# Altium PCB rpi_adapter.PcbDoc (part 1 of 3)
Units mil, origin at the board's own origin, x right, y up, seen from the top; angles counter-clockwise.
Board outline 1339.12 x 1250 mil, 4 copper layers (Top Layer, L02_GND, L03_GND, Bottom Layer), stack 36.268 mil thick; 18 components, 28 nets, 121 pads, 201 vias.
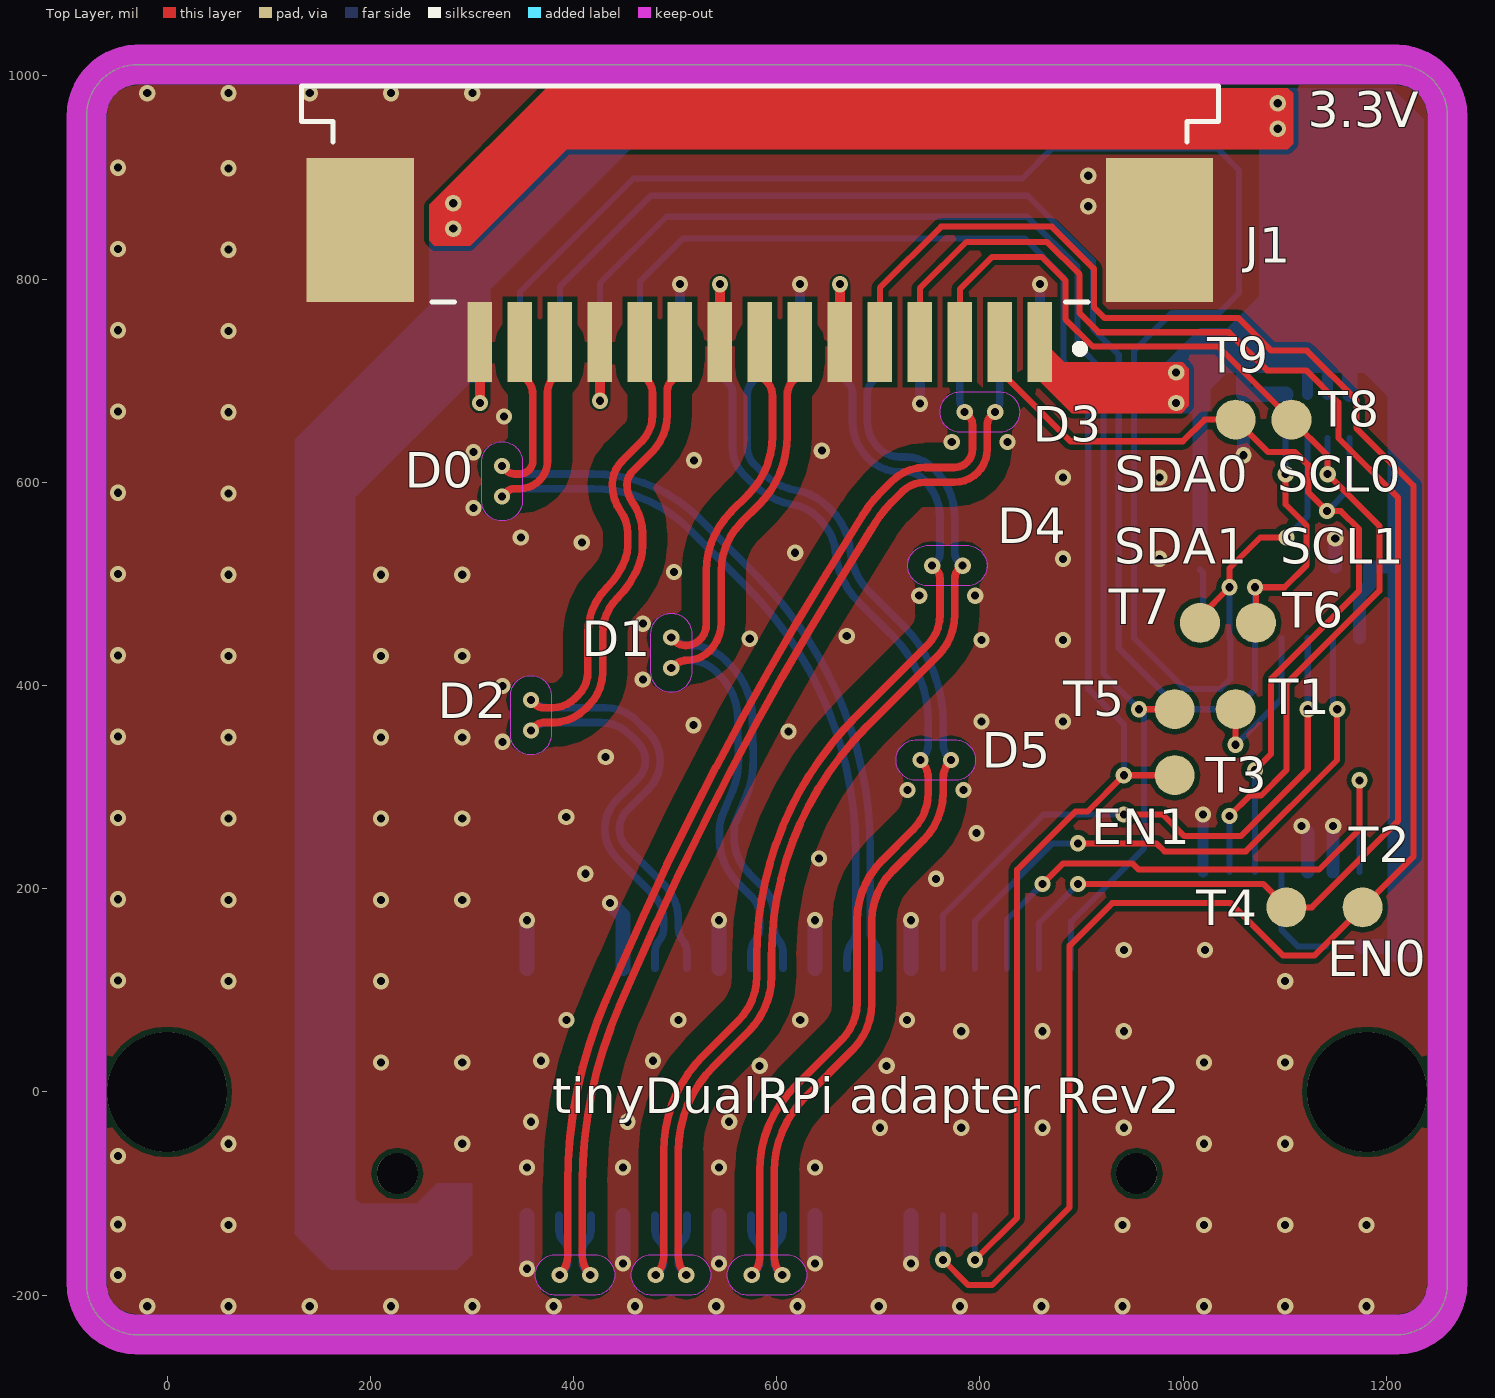
[diagram p0: Top Layer view]
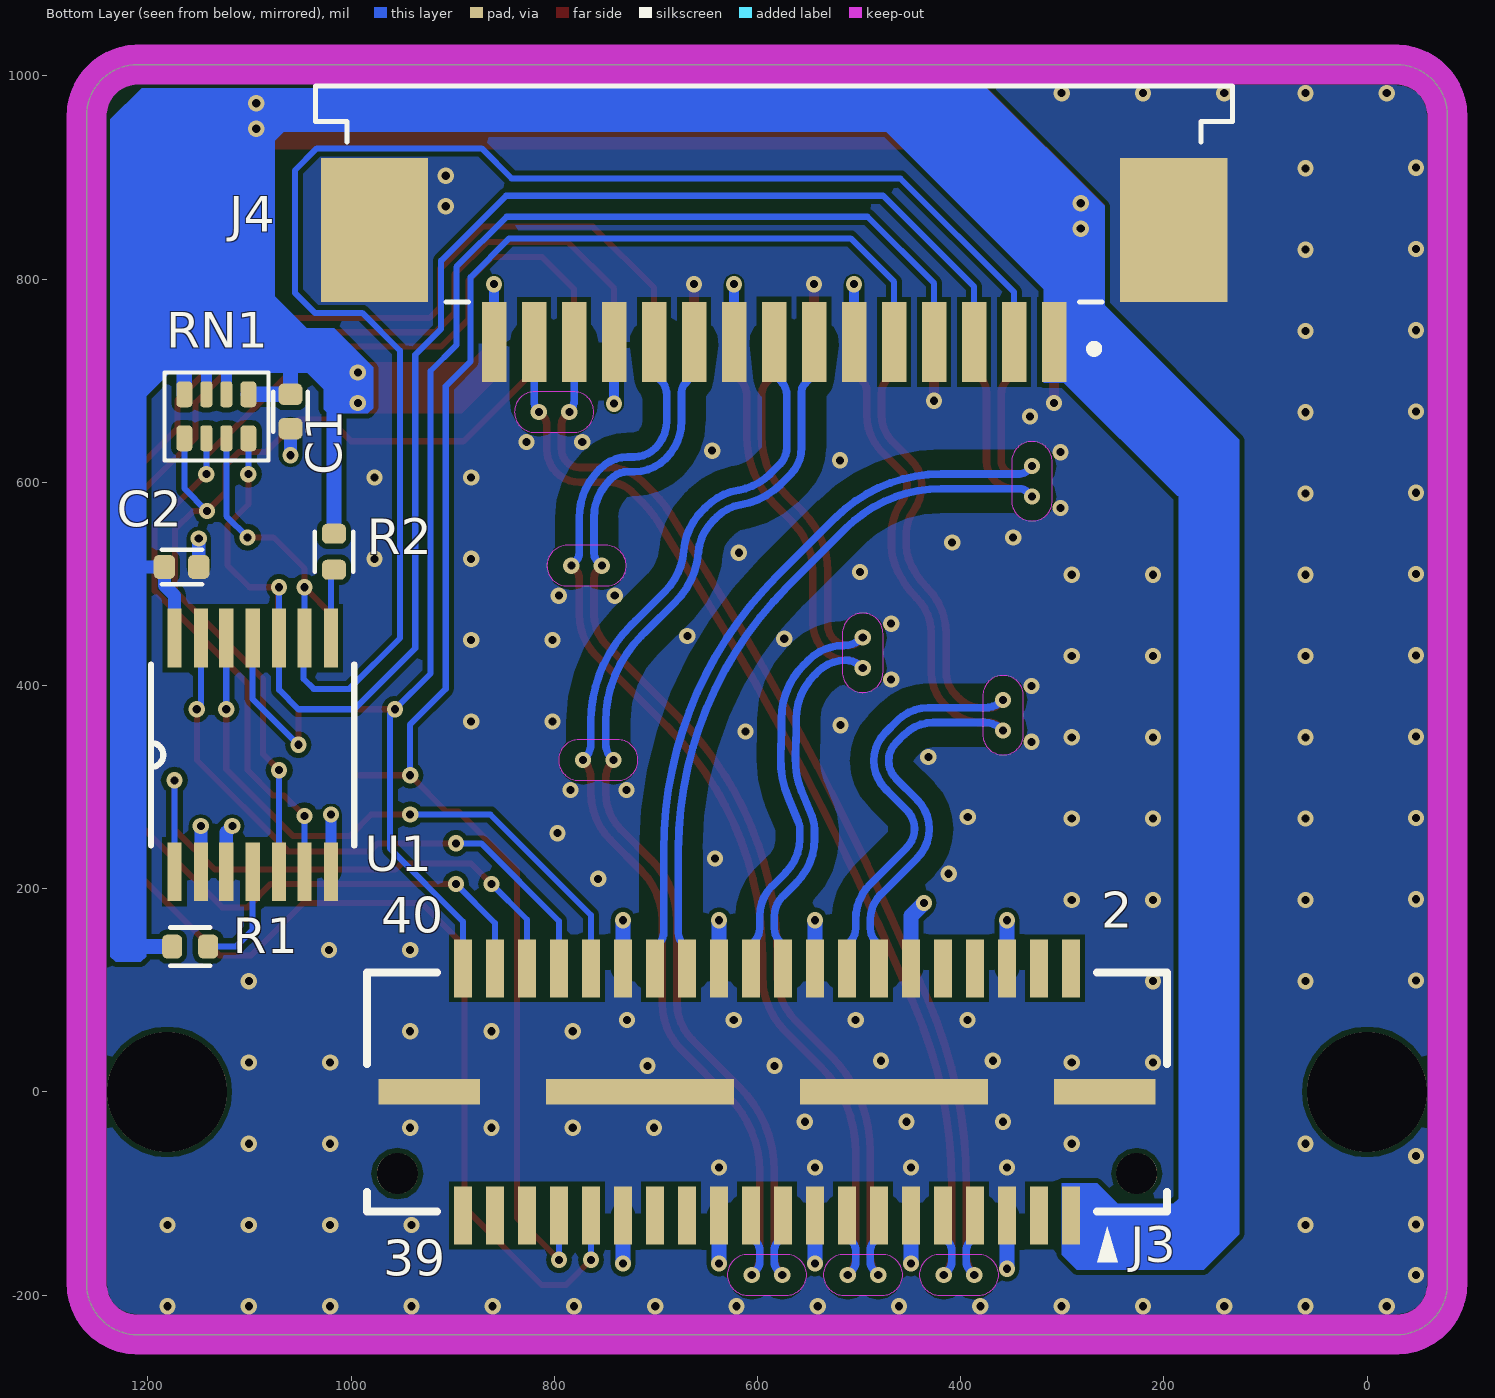
[diagram p1: Bottom Layer view, seen from below]
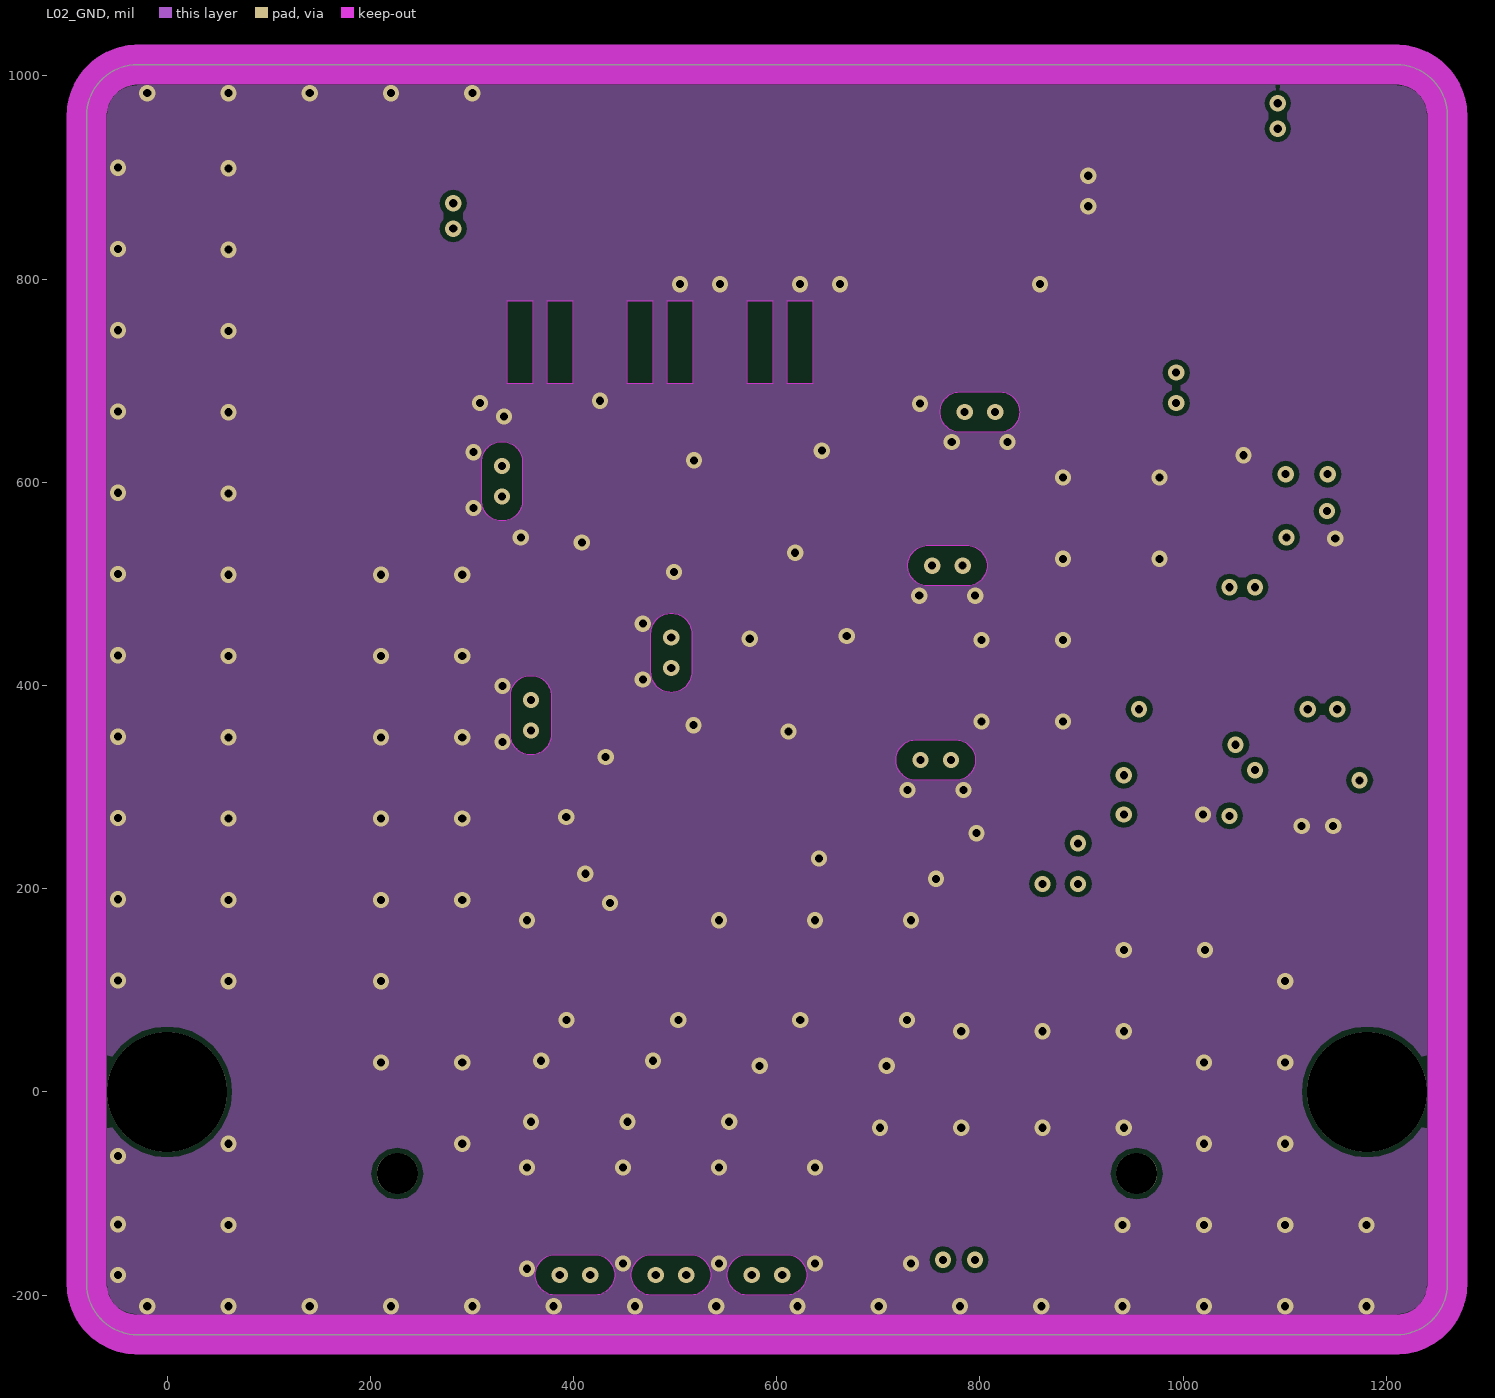
[diagram p2: L02_GND]
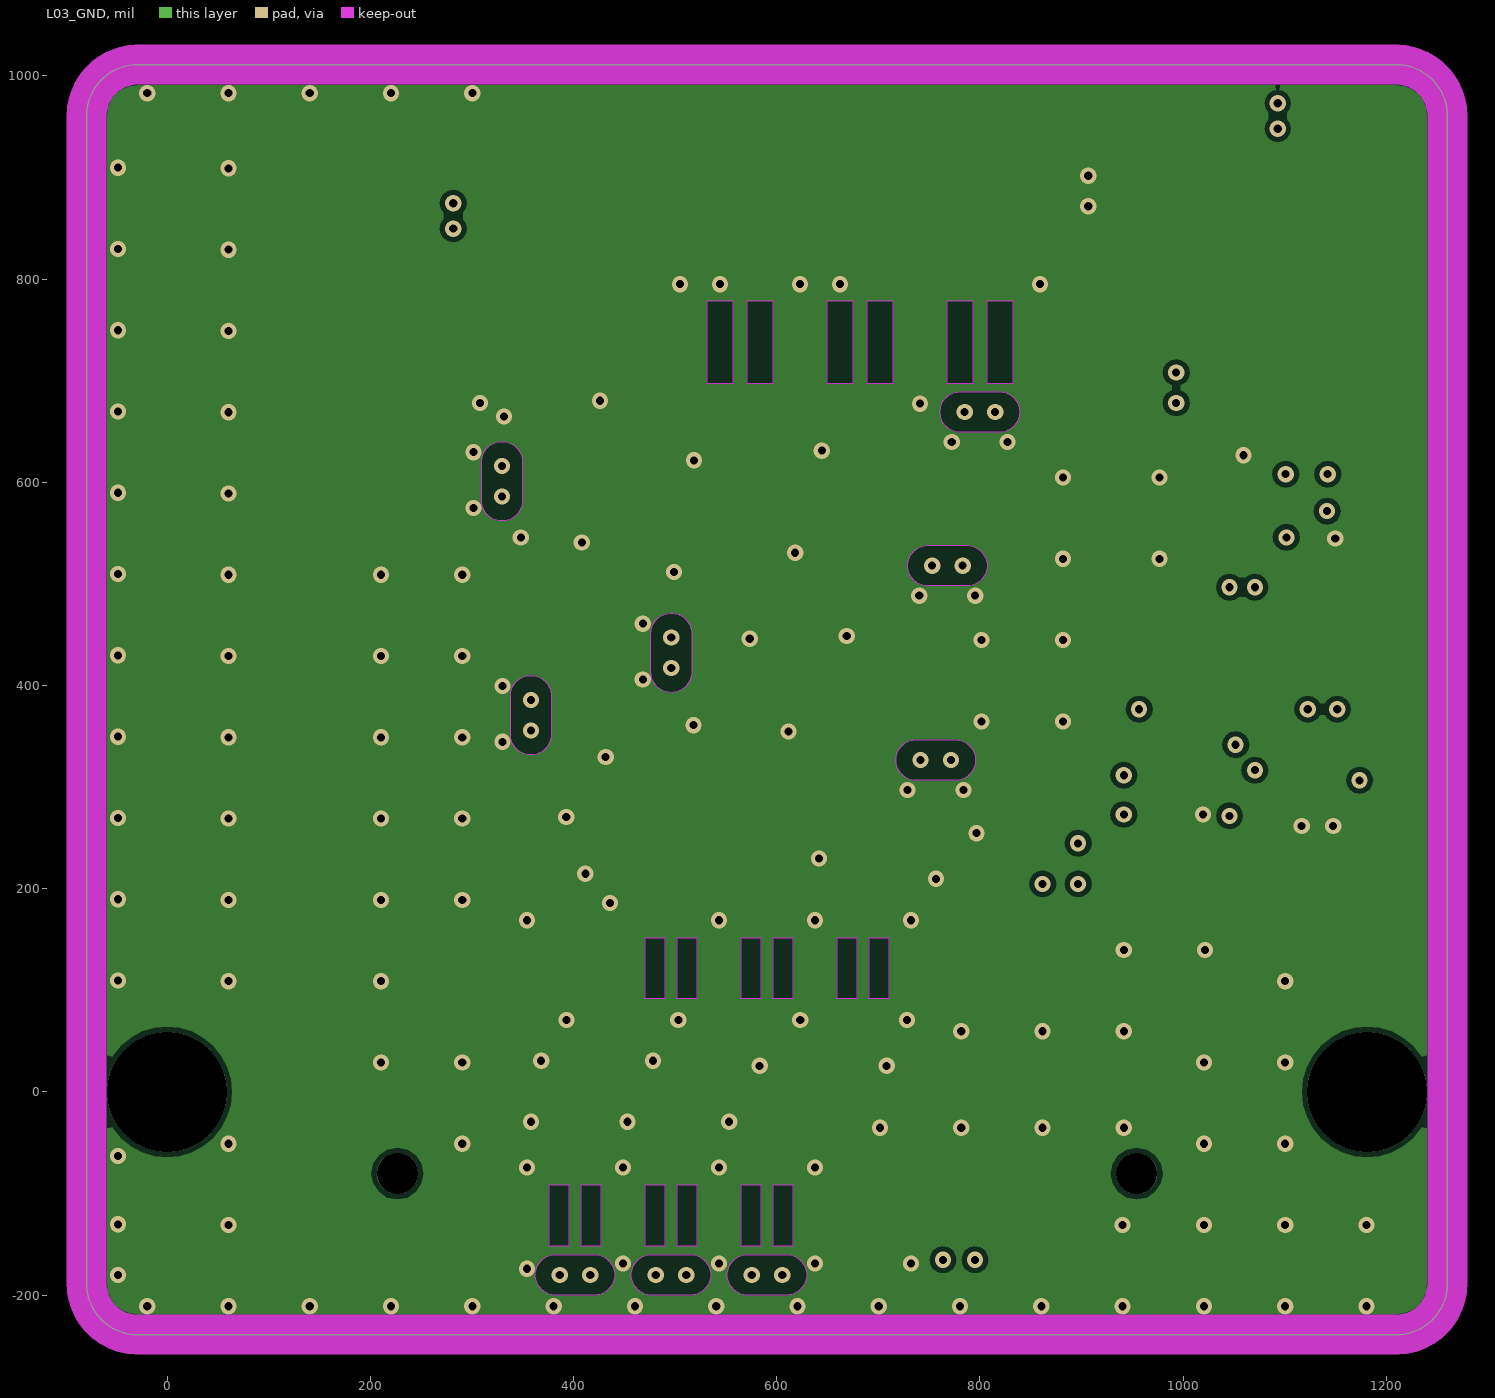
[diagram p3: L03_GND]
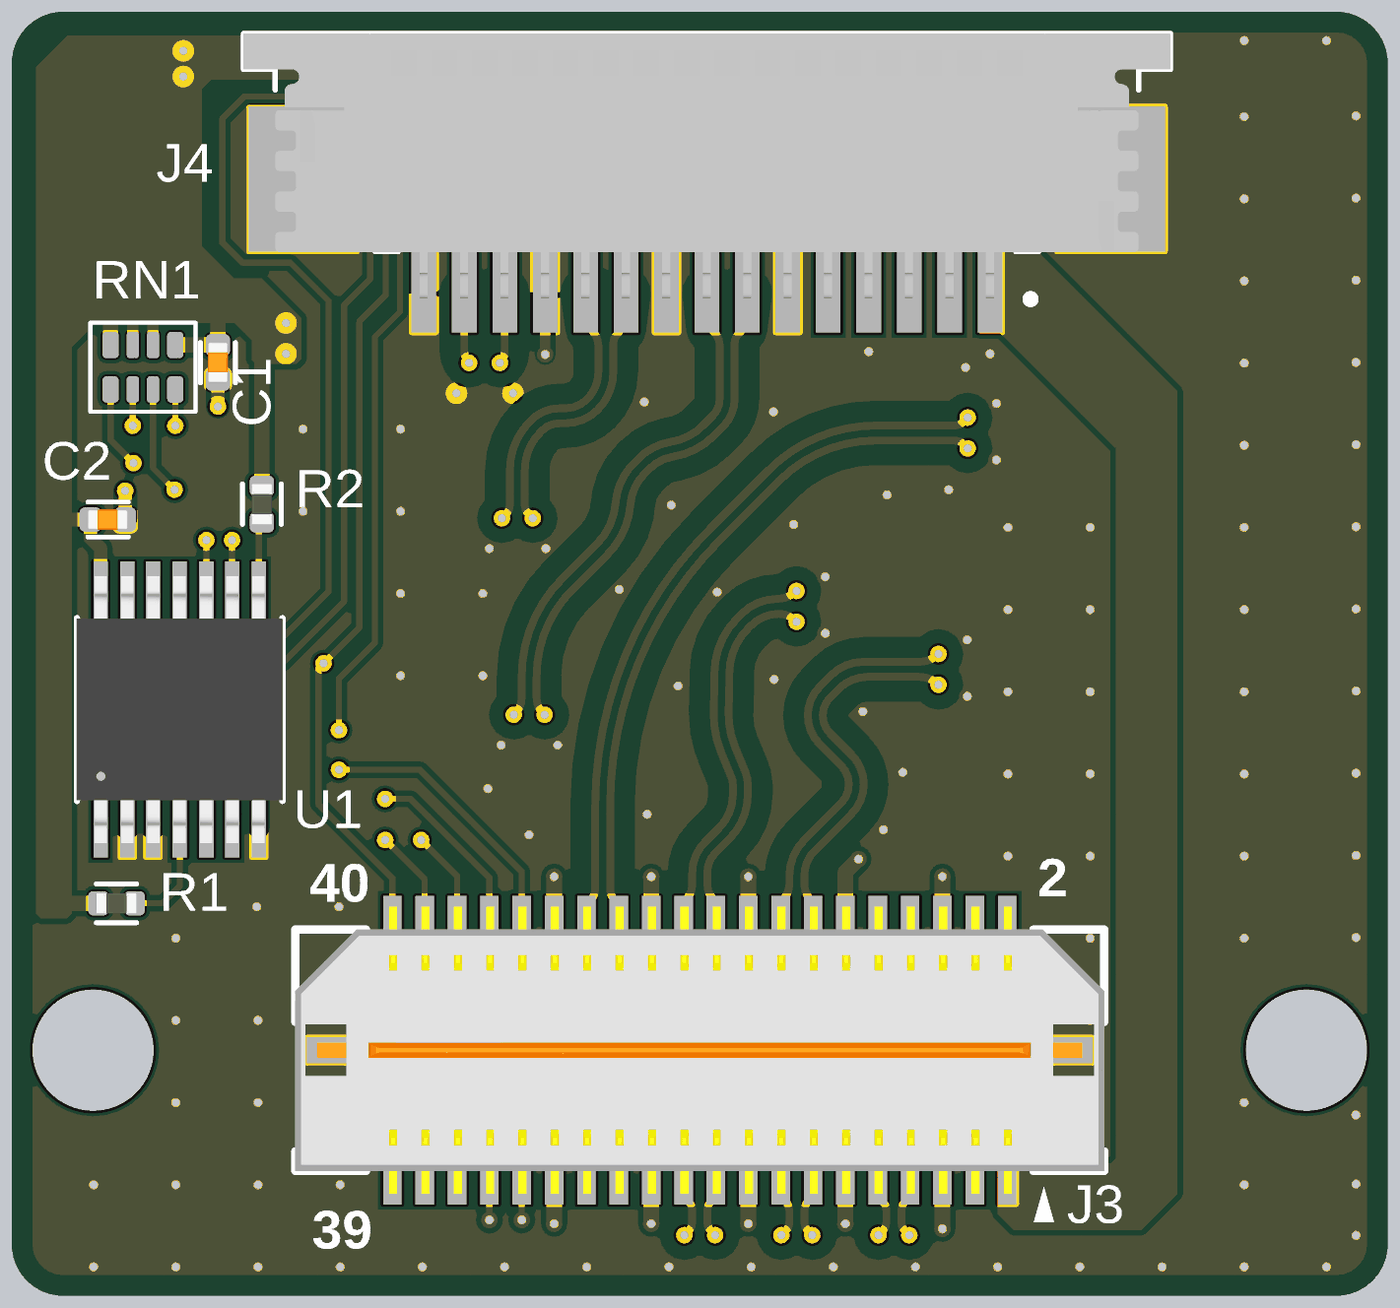
[diagram p5: 3D render of the assembled board from below, using the file's embedded part models]

## Layer stack, top to bottom
Top Solder: solder mask 1, SM-001, Dk 4
Top Layer: signal copper 1.378
Dielectric 1: prepreg 8.2835, 7628*1, Dk 4.05
L02_GND: signal copper 0.5984
Dielectric 2: core 15.748, Core, Dk 4.05
L03_GND: signal copper 0.5984
Dielectric 3: prepreg 8.2835, 7628*1, Dk 4.05
Bottom Layer: signal copper 1.378
Bottom Solder: solder mask 1, SM-001, Dk 4

## Board outline
-79.01,-188.99 ccw(c-29.01,-188.99) -29.01,-238.99 1210.11,-238.99 ccw(c1210.11,-188.99) 1260.11,-188.99 1260.11,961.01 ccw(c1210.11,961.01) 1210.11,1011.01 -29.01,1011.01 ccw(c-29.01,961.01) -79.01,961.01

## Design rules (kind name [scope] priority, off if disabled: settings)
BoardOutlineClearance [(IsPolygon OR IsTrack) AND IsNet] p1: gap=20 ignorepadtopadclearanceinfootprint=FALSE
Clearance Clearance_MIPI [InNetClass('MIPI')] p1: gap=5 ignorepadtopadclearanceinfootprint=TRUE except(20: Arc-Poly Track-Poly)
Clearance Clearance_Keepout [IsKeepOut] p2: gap=0.01 ignorepadtopadclearanceinfootprint=TRUE
Clearance Clearance_Poly [(IsTrack or IsArc) and InAnyDifferentialPair vs InNet('GND')    and InPoly] p3: gap=25 ignorepadtopadclearanceinfootprint=TRUE
Clearance Clearance_FID [InComponent('Designator1') OR InComponent('Designator2') OR InComponent('Designator3') OR InComponent('Designator4') OR InComponent('Designator5') OR InComponent('Designator6')] p4: gap=6 ignorepadtopadclearanceinfootprint=TRUE except(0: Arc-Arc; 5: Arc-Fill Arc-Poly Arc-Region Track-Fill Track-Poly Track-Region SMDPad-Fill SMDPad-Poly SMDPad-Region Via-Fill Via-Poly Via-Region; 5.98: Arc-Track)
Clearance [All] p5: gap=5 ignorepadtopadclearanceinfootprint=TRUE
ComponentClearance [All] p1 off: gap=5 collisioncheckmode=3 verticalgap=10 showdistances=FALSE
DiffPairsRouting [All] p1: maxlimit=7 minlimit=7 mostfreqgap=7 toplayer_minwidth=7.55 toplayer_maxwidth=7.55 toplayer_prefwidth=7.55 midlayer1_minwidth=7.55 midlayer1_maxwidth=7.55 midlayer1_prefwidth=7.55 midlayer2_minwidth=7.55 midlayer2_maxwidth=7.55 midlayer2_prefwidth=7.55 bottomlayer_minwidth=7.55 bottomlayer_maxwidth=7.55 bottomlayer_prefwidth=7.55 maxuncoupledlength=500
Height [All] p1 off: minheight=0 maxheight=1000 prefheight=500
HoleSize [All] p1: absolutevalues=TRUE maxlimit=120 minlimit=1 maxpercent=80.000 minpercent=20.000
MatchedLengths MatchedLengths_CAM [InDifferentialPairClass('CAM0') or InDifferentialPairClass('CAM1')] p1: tolerance=5 checknetsindiffpair=TRUE checkdiffpairvsdiffpair=FALSE checkxsignals=FALSE checkothers=FALSE
MinimumSolderMaskSliver [All] p1: minsoldermaskwidth=1.5
PlaneClearance [All] p1: clearance=10
PolygonConnect PolygonConnect_1 [InNet('VDD_IR')] p1: connectstyle=Direct reliefconductorwidth=10 reliefentries=4 polygonreliefangle="90 Angle" airgapwidth=10
PolygonConnect [All] p2: thpad.connectstyle=Relief thpad.reliefconductorwidth=10 thpad.reliefentries=4 thpad.polygonreliefangle="90 Angle" thpad.airgapwidth=10 smdpad.connectstyle=Direct smdpad.reliefconductorwidth=10 smdpad.reliefentries=4 smdpad.polygonreliefangle="90 Angle" smdpad.airgapwidth=10 via.connectstyle=Direct via.reliefconductorwidth=10 via.reliefentries=4 via.polygonreliefangle="90 Angle" via.airgapwidth=10
RoomDefinition "AiC camera adapter" [InComponentClass('AiC camera adapter')] p1 off: confinementstyle=ConfineIn formatcopy=TRUE lockcomponents=FALSE outline 423.28,-538.96 3809.28,-538.96 3809.28,1510.04 423.28,1510.04
RoutingVias [All] p1: holewidth=8 width=16 viastyle="Through Hole" minholewidth=8 minwidth=16 maxholewidth=8 maxwidth=16
ShortCircuit [IsNet] p1: allowed=FALSE
SilkToSilkClearance [All] p1: silktosilkclearance=1
SilkToSolderMaskClearance [IsPad] p1: minsilkscreentomaskgap=1 clearancetoexposedcopper=TRUE
SolderMaskExpansion SolderMaskExpansion_via [IsVia] p1: expansion=3 istentingtop=FALSE
SolderMaskExpansion [All] p2: expansion=2.5 istentingtop=FALSE
Width [All] p1: maxlimit=50 minlimit=6 preferedwidth=6
21 further rules are at their usual default settings.

## Classes and differential pairs
differential pair class MIPI: MIPI_CLK MIPI_D0 MIPI_D1
net class MIPI: DIFF0_N DIFF0_P DIFF1_N DIFF1_P DIFF2_N DIFF2_P DIFF3_N DIFF3_P DIFF4_N DIFF4_P DIFF5_N DIFF5_P
differential pair DIFF5: +DIFF5_P -DIFF5_N
differential pair DIFF4: +DIFF4_P -DIFF4_N
differential pair DIFF3: +DIFF3_P -DIFF3_N
differential pair DIFF2: +DIFF2_P -DIFF2_N
differential pair DIFF1: +DIFF1_P -DIFF1_N
differential pair DIFF0: +DIFF0_P -DIFF0_N
differential pair MIPI_D1: +"" -""
differential pair MIPI_D0: +"" -""
differential pair MIPI_CLK: +"" -""

## Components (designator, comment, footprint, x,y, rotation, side; value= is the part's Value field where it differs from the comment)
C1 "0.1uF" CAPC1005X55USR 1059.6,669.72 r90 bottom
C2 "0.1uF" CAPC1005X55USR 1166.76,516.68 r0 bottom
J1 "1-84953-5" TE_1-84953-5 583.56,738.02 r180 top
J3 "QTE-020-01-F-D-A-K" SAMTEC_QTE-020-01-X-D-A 590.55,0 r0 bottom locked
J4 "1-84953-5" TE_1-84953-5 583.56,738.02 r0 bottom
R1 "1K" RESC1005X40USR 1158.28,143.04 r0 bottom
R2 "1K" RESC1005X40USR 1016.77,531.68 r90 bottom
RN1 "10K" RESCAXS50P100X200X45-8NA 1132.55,665 r90 bottom
T1 "TP_S" "TP 1mm" 1051.77,376.68 r0 top
T2 "TP_S" "TP 1mm" 1176.77,181.68 r0 top
T3 "TP_S" "TP 1mm" 991.77,311.68 r0 top
T4 "TP_S" "TP 1mm" 1101.77,181.68 r0 top
T5 "TP_S" "TP 1mm" 991.77,376.68 r0 top
T6 "TP_S" "TP 1mm" 1071.77,461.68 r0 top
T7 "TP_S" "TP 1mm" 1016.77,461.68 r0 top
T8 "TP_S" "TP 1mm" 1106.77,661.68 r0 top
T9 "TP_S" "TP 1mm" 1051.77,661.68 r0 top
U1 "PCA9542APW,118" SOP65P640X110-14N 1096.77,331.68 r90 bottom

## Footprints (in the part's own frame and the unit in brackets; to place one, negate y for a bottom-side part, rotate by r counter-clockwise, add the part's x,y. Pads: shape width x height; smd on the part's side, far side on the other; paste and mask are expansions set on the pad)
CAPC1005X55USR [mm] "Capacitor, Chip; 1.00 mm L X 0.50 mm W X 0.55 mm H body"
  rrect52% 0.54x0.6 smd mask+0.051: 1(-0.43,0) 2(0.43,0)
  silkscreen extent -0.51,-0.43 0.49,0.43, body extent -0.5,-0.25 0.5,0.25, height 0.55
RESC1005X40USR [mm] "Resistor, Chip; 1.00 mm L X 0.50 mm W X 0.40 mm H body"
  rrect52% 0.5x0.6 smd mask+0.051: 1(-0.45,0) 2(0.45,0)
  silkscreen extent -0.5,-0.48 0.5,0.48, body extent -0.5,-0.25 0.5,0.25, height 0.4
RESCAXS50P100X200X45-8NA [mm] "2 Side, Convex"
  rrect50% 0.65x0.4 smd mask+0.051: 1(-0.55,0.8) 4(-0.55,-0.8) 5(0.55,-0.8) 8(0.55,0.8)
  rrect50% 0.65x0.3 smd mask+0.051: 2(-0.55,0.25) 3(-0.55,-0.25) 6(0.55,-0.25) 7(0.55,0.25)
  silkscreen extent -1.1,-1.3 1.1,1.3, body extent -0.65,-1.15 0.65,1.15, height 0.45
SAMTEC_QTE-020-01-X-D-A [mm]
  rect 0.46x1.45 smd: 01(-7.6,3.09) 02(-7.6,-3.09) 03(-6.8,3.09) 04(-6.8,-3.09) 05(-6,3.09) 06(-6,-3.09) 07(-5.2,3.09) 08(-5.2,-3.09) 09(-4.4,3.09) 10(-4.4,-3.09) 11(-3.6,3.09) 12(-3.6,-3.09) 13(-2.8,3.09) 14(-2.8,-3.09) 15(-2,3.09) 16(-2,-3.09) 17(-1.2,3.09) 18(-1.2,-3.09) 19(-0.4,3.09) 20(-0.4,-3.09) 21(0.4,3.09) 22(0.4,-3.09) 23(1.2,3.09) 24(1.2,-3.09) 25(2,3.09) 26(2,-3.09) 27(2.8,3.09) 28(2.8,-3.09) 29(3.6,3.09) 30(3.6,-3.09) 31(4.4,3.09) 32(4.4,-3.09) 33(5.2,3.09) 34(5.2,-3.09) 35(6,3.09) 36(6,-3.09) 37(6.8,3.09) 38(6.8,-3.09) 39(7.6,3.09) 40(7.6,-3.09)
  rect 2.54x0.64 smd: G1(-8.445,0) G4(8.445,0)
  rect 4.7x0.64 smd: G2(-3.175,0) G3(3.175,0)
  round 1.02 hole 1.02 unplated: ""(-9.24,2.04) ""(9.24,2.04)
  silkscreen extent -10,-2.98 10,4.25, body extent -10.01,-3.56 10.01,3.56, height 4.26
SOP65P640X110-14N [mil]
  rect 58x14 smd: 1(-115,77) 2(-115,51) 3(-115,26) 4(-115,0) 5(-115,-26) 6(-115,-51) 7(-115,-77) 8(115,-77) 9(115,-51) 10(115,-26) 11(115,0) 12(115,26) 13(115,51) 14(115,77)
  silkscreen extent -89,-100 89,100, body extent -130,-101 130,101, height 43
TE_1-84953-5 [mm]
  rect 0.61x2 smd: 1(-7,0) 2(-6,0) 3(-5,0) 4(-4,0) 5(-3,0) 6(-2,0) 7(-1,0) 8(0,0) 9(1,0) 10(2,0) 11(3,0) 12(4,0) 13(5,0) 14(6,0) 15(7,0)
  rect 2.68x3.6 smd: M1(-9.99,-2.8) M2(9.99,-2.8)
  silkscreen extent -11.46,-6.4 11.46,0.27, body extent -11.46,-6.4 11.46,0.15, height 2.56
"TP 1mm" [mm] "1 mm Probe Pad"
  round 1 smd: 1(0,0)

## Part data
C1 C2: library part "CAP CER 0.1UF 16V X7R 0402", "CAP CER 0.1UF 16V X7R 0402", Manufacturer="TDK Corporation", Manufacturer Part Number=CGA2B1X7R1C104K050BC, Package=0402, Supplier Part Number 1=445-5613-2-ND, Height=0.55mm, Supplier 1=Digi-Key
J1 J4: library part "FPC - 15P - 2MP", "Conn FPC Connector SKT 15 POS 1mm Solder RA SMD T/R", Actuator Color=Black, Contact Current Rating=1A, Flammability Rating="UL94 V-0", Housing Color=Natural, Manufacturer="TE Connectivity", Max Operating Temperature=85°C, Max Voltage Rating (AC)=200V, Min Operating Temperature=-40°C, Package Quantity=1200, Supplier Part Number 1=A101405CT-ND, Actuator Material=Nylon,Glass,Polyamide, Category="FFC / FPC", ComponentLink1Description=https://datasheet.ciiva.com/669/eng-cd-84953-a3-669110.pdf?src-supplier=Digi-Key, ComponentLink1URL=https://datasheet.ciiva.com/669/eng-cd-84953-a3-669110.pdf?src-supplier=Digi-Key, ComponentLink2Description=https://datasheet.ciiva.com/669/eng-cd-84953-a3-669111.pdf?src-supplier=Digi-Key, ComponentLink2URL=https://datasheet.ciiva.com/669/eng-cd-84953-a3-669111.pdf?src-supplier=Digi-Key, ComponentLink3Description=https://datasheet.ciiva.com/669/eng-cd-84953-a3-669112.pdf?src-supplier=Digi-Key, ComponentLink3URL=https://datasheet.ciiva.com/669/eng-cd-84953-a3-669112.pdf?src-supplier=Digi-Key, Connector System=Flex-to-Board, Connector Type=Receptacle,Connector,Socket, Contact Location=Top, Contact Material=Bronze, Contact Plating=Tin,Bright, Current Rating=1A, Depth=7.3mm, ELV=Compliant, Gender=Receptacle, Height=2.56mm, Housing Material=Polymer, Length=22.92mm, Manufacturer Part Number=1-84953-5, Mating Alignment="Yes (With)", Mount="Surface Mount", Number of Contacts=15, Number of Positions=15, Number of Rows=1, Orientation="Right Angle", Packaging="Tape and Reel", PCB Mount Alignment="No (Without)", PCB Mount Retention=With, PCB Mounting Orientation="Right Angle", Pitch=0.039inch, Plating Thickness=2um, Pricing 1="1=1.02000, 10=0.97700, 25=0.93400, 50=0.92100, 100=0.80470, 250=0.77460, 500=0.73158 (USD)", Radiation Hardening=No, RoHS=Yes, RoHS Compliant=Yes, Sealable="No (Without)", Series=FPC, Shielding=Unshielded, Shrouded="Yes (With)", Stock 1=9836, Supplier 1=Digi-Key, Termination=SMD/SMT, Voltage Rating=200V, Width=0.2575inch, Wire/Cable Type="Flat Flex"
J3: library part QSE-020-01-F-D-A-K, "Q Strip® High-Speed Ground Plane Header, 0.80mm Pitch", Manufacturer=Samtec, Manufacturer Part Number=QTE-020-01-F-D-A, Package Quantity=1, Supplier Part Number 1=SAM8846-ND, Category="Board to Board Connectors", ComponentLink1Description=https://datasheet.ciiva.com/6924/qte-xxx-xx-x-d-xxx-mkt-6924765.pdf?src-supplier=Digi-Key, ComponentLink1URL=https://datasheet.ciiva.com/6924/qte-xxx-xx-x-d-xxx-mkt-6924765.pdf?src-supplier=Digi-Key, Contact Plating=Gold, Gender=Male, Mated Stacking Heights=5mm, Mounting Technology="Surface Mount", Number of Contacts=40, Number of Positions=40, Number of Rows=2, Packaging=Tray, Pitch=0.031inch, Pricing="1=5.61000, 10=5.09400, 25=4.82480, 40=4.71275, 80=4.48825, 230=3.92726, 440=3.81505, 945=3.25402, 2400=3.02960 (USD)", RoHS=Yes, RoHS Compliant=Yes, Series="QStrip® QTE", Stock=179, Supplier 1=Digi-Key, Termination=Solder
R1 R2: library part "RES 1K OHM 1% 1/16W 0402", "RES SMD 1K OHM 1% 1/16W 0402", Manufacturer=YAGEO, Manufacturer Part Number=RC0402FR-071KL, Package=0402, Supplier Part Number 1=311-1.00KLRCT-ND, Height=0.4mm, Supplier 1=Digi-Key
RN1: library part "RES ARRAY 4 RES 47K OHM 0804", "Res Thick Film Array 10K Ohm 5% ±200ppm/°C ISOL 8-Pin 0804(4 X 0402) Convex SMD Automotive T/R", Case Code (Imperial)=0402, Case Code (Metric)=1005, Case/Package=0804, Manufacturer=Panasonic, Manufacturer Part Number=EXB-28V103JX, Max Operating Temperature=125°C, Min Operating Temperature=-55°C, Number of Resistors=4, Package Quantity=1, Power Dissipation=63mW, Power Per Element=62.5mW, Resistance Tolerance=5%, Supplier Part Number 1=Y7103CT-ND, Temperature Coefficient=200ppm/°C, Voltage Rating=50V, Voltage Rating (DC)=100V, Category="Resistor Arrays", Circuit Type=Isolated, ComponentLink1Description=https://datasheet.ciiva.com/46387/1480003-46387949.pdf?src-supplier=Element14, ComponentLink1URL=https://datasheet.ciiva.com/46387/1480003-46387949.pdf?src-supplier=Element14, ComponentLink2Description=https://datasheet.ciiva.com/46376/1480003-46376265.pdf?src-supplier=Element14, ComponentLink2URL=https://datasheet.ciiva.com/46376/1480003-46376265.pdf?src-supplier=Element14, ComponentLink3Description=https://datasheet.ciiva.com/28418/1790599-28418558.pdf?src-supplier=Element14, ComponentLink3URL=https://datasheet.ciiva.com/28418/1790599-28418558.pdf?src-supplier=Element14, ComponentLink4Description=https://datasheet.ciiva.com/28636/1790599-28636885.pdf?src-supplier=Element14, ComponentLink4URL=https://datasheet.ciiva.com/28636/1790599-28636885.pdf?src-supplier=Element14, ComponentLink5Description=https://datasheet.ciiva.com/30209/aoc0000ce1-30209125.pdf?src-supplier=Onlinecomponents.com, ComponentLink5URL=https://datasheet.ciiva.com/30209/aoc0000ce1-30209125.pdf?src-supplier=Onlinecomponents.com, Depth=1mm, Height=0.35mm, Lead Free="Lead Free", Length=2mm, Military Standard=Not, Mounting Technology="Surface Mount", Number of Contacts=8, Number of Elements=4, Packaging="Tape and Reel", Pins=8, Pricing="1=0.10000, 10=0.08100, 25=0.05640, 50=0.04380, 100=0.03130, 250=0.02444, 500=0.01942, 1000=0.01378, 5000=0.01065 (USD)", Radiation Hardening=No, Reach SVHC Compliant=Unknown, RoHS=Yes, RoHS Compliant=Yes, Series=EXB, Stock=1570078, Supplier 1=Digi-Key, Technology="THICK FILM", Terminal Pitch=0.5mm, Termination=Convex, Tolerance=5%, Width=1mm
T1 T2 T3 T4 T5 T6 T7 T8 T9: "test point"
U1: "PCA9542A Series 2-Channel I2C-bus Multiplexer with Interrupt Logic - TSSOP - 14", Case/Package=TSSOP, Clock Frequency=400kHz, High Level Output Current=-10uA, Low Level Output Current=10mA, Manufacturer="NXP Semiconductors", Max Operating Temperature=85°C, Max Supply Current=25uA, Max Supply Voltage=5.5V, Min Operating Temperature=-40°C, Min Supply Voltage=2.3V, Nominal Supply Voltage=3.6V, Operating Supply Voltage=5V, Package Quantity=1, Power Dissipation=400mW, Supplier Part Number 1=568-1856-1-ND, Supply Current=100mA, Category="Interface ICs", ComponentLink1Description=https://datasheet.ciiva.com/4806/pca9542a-185703-4806721.pdf?src-supplier=Mouser, ComponentLink1URL=https://datasheet.ciiva.com/4806/pca9542a-185703-4806721.pdf?src-supplier=Mouser, ComponentLink2Description=https://datasheet.ciiva.com/15087/getdatasheetpartid-214981-15087231.pdf?src-supplier=Verical, ComponentLink2URL=https://datasheet.ciiva.com/15087/getdatasheetpartid-214981-15087231.pdf?src-supplier=Verical, ComponentLink3Description=https://datasheet.ciiva.com/8242/pca9542a-8242759.pdf?src-supplier=Avnet, ComponentLink3URL=https://datasheet.ciiva.com/8242/pca9542a-8242759.pdf?src-supplier=Avnet, ComponentLink4Description=https://datasheet.ciiva.com/1784/pca9542a-1784041.pdf?src-supplier=Digi-Key, ComponentLink4URL=https://datasheet.ciiva.com/1784/pca9542a-1784041.pdf?src-supplier=Digi-Key, ComponentLink5Description=https://datasheet.ciiva.com/1784/pca9542a-1784042.pdf?src-supplier=Digi-Key, ComponentLink5URL=https://datasheet.ciiva.com/1784/pca9542a-1784042.pdf?src-supplier=Digi-Key, ComponentLink6Description=https://datasheet.ciiva.com/1784/pca9542a-1784043.pdf?src-supplier=Digi-Key, ComponentLink6URL=https://datasheet.ciiva.com/1784/pca9542a-1784043.pdf?src-supplier=Digi-Key, ComponentLink7Description=https://datasheet.ciiva.com/16219/pca9542a-16219928.pdf?src-supplier=Future+Electronics, ComponentLink7URL=https://datasheet.ciiva.com/16219/pca9542a-16219928.pdf?src-supplier=Future+Electronics, Height=0.95mm, Interface=I2C,SMBus, Lead Free="Lead Free", Length=5.1mm, Logic Function=Multiplexer, Manufacturer Part Number=PCA9542APW,118, Mounting Technology="Surface Mount", Number Of Channels=2, Number of Input Lines=2, Number of Inputs=2, Number of Output Lines=1, Number of Outputs=1, Packaging="Tape and Reel", Pins=14, Pricing="1=2.50000, 10=2.24900, 25=2.12160, 100=1.80750, 250=1.69720, 500=1.48506, 1000=1.23047 (USD)", Propagation Delay=0.3ns, Radiation Hardening=No, RoHS=Yes, RoHS Compliant=Yes, Series=-, Stock=18695, Supplier 1=Digi-Key, Weight=0.004949oz, Width=4.5mm

## Free pads (board coordinates)
  round 118.11 hole 118.11 unplated: 0(0,0) 0(1181.1,0)

## Via types
v1: diameter 16, hole 8, Top Layer to Bottom Layer, tented both sides, 155 vias
v2: diameter 16, hole 8, Top Layer to Bottom Layer, 46 vias

## Nets (pads, with @x,y where several pads share a name; then routed paths per layer and width w, separated by ;. In a path a pad name is that pad's centre, name@x,y a point inside that pad or via, vN(x,y) a via of type N, cw(c..) or ccw(c..) an arc to the next point about the centre after c; other vN are vias at no path point)
CAM0_SCL: J1.3 RN1.2 T8.1 U1.6 | length 1063.8
  Top Layer w6: J1.3@780.41,738.02 780.41,790.17 811.92,821.68 861.32,821.68 884.22,798.78 884.22,760.69 911.22,733.68 1034.77,733.68 T8.1@1106.77,661.68 1142.39,626.06 v2(1142.39,608.04) 1193.28,557.15 1193.28,493.19 1101.77,401.68 1101.77,316.68 1076.77,291.68 1065.77,291.68 v2(1045.77,271.68)
  Bottom Layer w6: U1.6@1045.77,216.68 v2(1045.77,271.68) ; v2(1142.39,608.04) v2@1142.39,614.16 ; v2@1142.38,614.17 RN1.2@1142.39,643.35
CAM0_SDA: J1.2 RN1.1 T9.1 U1.5 | length 940.2
  Top Layer w6: J1.2@819.78,738.02 819.78,709.77 889.19,640.37 999.9,640.37 1021.21,661.68 T9.1@1051.77,661.68 1083.72,629.73 1110.41,629.73 1123.28,616.86 1123.28,590.17 v2(1141.77,571.68) 1155.46,571.68 1173.28,553.86 1173.28,493.19 1086.77,406.68 1086.77,332.68 v1(1070.77,316.68)
  Bottom Layer w6: U1.5@1070.77,216.68 v1(1070.77,316.68) ; v2(1141.77,571.68) 1164.05,593.96 RN1.1@1164.04,643.35
CAM1_SCL: J4.3 RN1.4 T6.1 U1.10 | length 1531.1
  Top Layer w6: T6.1@1071.77,461.68 1071.77,495.68 v2(1070.77,496.68) 1099.9,496.68 1121.68,518.46 1121.68,557.51 1101.05,578.14 v2(1101.05,608.04)
  Bottom Layer w6: J4.3@386.7,738.02 386.7,792.46 476.28,882.04 847.28,882.04 911.28,818.04 911.28,751.04 936.77,725.55 936.77,436.68 996.77,376.68 1051.77,376.68 1070.77,395.68 U1.10@1070.77,446.68 v2(1070.77,496.68) ; v2(1101.05,608.04) RN1.4@1101.05,643.35
CAM1_SDA: J4.2 RN1.3 T7.1 U1.9 | length 1805.7
  Top Layer w6: T7.1@1016.77,461.68 1016.77,467.68 v2(1045.77,496.68) 1045.77,515.25 1076.28,545.76 v2(1101.77,545.76)
  Bottom Layer w6: J4.2@347.33,738.02 347.33,787.09 459.28,899.04 841.93,899.04 871.52,928.62 1033.55,928.62 1055.28,906.9 1055.28,786.49 1035.61,766.82 989.1,766.82 951.77,729.49 951.77,446.68 1001.77,396.68 1036.77,396.68 1046.77,406.68 1046.77,445.68 U1.9@1045.77,446.68 v2(1045.77,496.68) ; v2(1101.77,545.76) 1122.7,566.69 RN1.3@1122.7,643.35
DIFF0_N: J1.14 J3.28 | length 867.1
  Top Layer w7.55: v2(329.77,615.95) 334.17,611.56 ccw(c342.2,619.59) 342.2,608.23 347.15,608.23 ccw(c347.15,621.1) 360.03,621.1 360.03,686.12 ccw(c337.93,686.12) 353.68,701.61 cw(c369.44,717.11) 347.34,717.11 J1.14@347.34,738.02
  Bottom Layer w7.55: v2(329.77,615.95) 334.17,611.56 ccw(c342.2,619.59) 342.2,608.23 418.89,608.23 cw(c418.89,460.65) 523.25,565 580.36,507.89 cw(c310.1,237.62) 692.31,237.62 692.31,156.93 ccw(c708.23,156.93) 695.26,147.7 cw(c669.32,129.24) 699.6,139.08 cw(c676.64,131.62) 700.78,131.62 J3.28@700.79,121.65
DIFF0_P: J1.13 J3.26 | length 867.1
  Top Layer w7.55: v2(329.77,585.95) 334.17,590.35 cw(c342.2,582.32) 342.2,593.68 347.15,593.68 ccw(c347.15,621.1) 374.58,621.1 374.58,686.12 ccw(c337.93,686.12) 374.53,688.02 ; 374.58,688.02 ccw(c342.52,688.02) 374.57,688.48 cw(c396,688.48) 380.64,703.42 ccw(c365.29,718.36) 386.71,718.36 J1.13@386.7,738.02
  Bottom Layer w7.55: v2(329.77,585.95) 334.17,590.35 cw(c342.2,582.32) 342.2,593.68 418.89,593.68 cw(c418.89,460.65) 512.96,554.72 570.07,497.6 cw(c310.1,237.62) 677.76,237.62 677.76,156.01 cw(c664.66,156.01) 674.89,147.83 ccw(c695.35,131.47) 670.5,139.75 ccw(c692.87,132.3) 669.29,132.3 J3.26@669.29,121.65
DIFF1_N: J1.8 J3.22 | length 738.1
  Top Layer w7.55: v2(496.37,447.15) 499.55,443.97 ccw(c510.56,454.97) 510.56,439.4 ccw(c510.56,459.34) 524.64,445.23 ccw(c509.68,460.2) 530.84,460.2 530.84,512.35 cw(c613.55,512.35) 555.07,570.83 571.93,587.69 ccw(c513.88,645.73) 595.97,645.73 595.97,684.79 ccw(c574.63,684.79) 589.77,699.83 cw(c604.9,714.88) 583.56,714.88 J1.8@583.56,738.02
  Bottom Layer w7.55: v2(496.37,447.15) ccw(c515.02,465.8) 515.02,439.42 cw(c515.02,390.55) 549.57,425.11 554.04,420.64 cw(c500.29,366.89) 576.3,366.89 576.3,357.25 577.02,329.25 cw(c480.22,326.79) 569.68,289.73 559.76,265.8 ccw(c577.53,258.45) 558.3,258.45 558.3,248.88 ccw(c604.28,248.88) 571.77,216.37 585.56,202.58 cw(c555.96,172.98) 597.82,172.98 597.82,160.92 ccw(c616.21,160.92) 602.05,149.18 cw(c587.9,137.44) 606.29,137.44 J3.22@606.3,121.65
DIFF1_P: J1.7 J3.20 | length 737.9
  Top Layer w7.55: v2(496.37,417.15) 498.3,419.08 cw(c512.24,405.14) 512.24,424.85 ccw(c512.24,455.28) 533.75,433.77 ccw(c505.65,461.87) 545.39,461.87 545.39,512.35 cw(c613.55,512.35) 565.35,560.53 582.21,577.4 ccw(c513.88,645.73) 610.52,645.73 610.52,685.86 cw(c631.35,685.86) 616.26,700.22 616.72,700.7 ccw(c600.42,716.22) 622.93,716.22 J1.7@622.93,738.02
  Bottom Layer w7.55: v2(496.37,417.15) 497.6,418.38 cw(c513.28,402.7) 513.28,424.87 cw(c513.28,386.36) 540.51,413.59 543.75,410.35 cw(c500.28,366.88) 561.76,366.88 561.76,356.88 562.47,328.88 cw(c480.22,326.79) 556.23,295.3 546.32,271.37 ccw(c577.53,258.45) 543.75,258.45 543.75,248.88 ccw(c604.28,248.88) 561.48,206.08 575.27,192.29 cw(c555.96,172.98) 583.27,172.98 583.27,160.92 cw(c564.88,160.92) 579.04,149.18 ccw(c593.19,137.44) 574.8,137.44 J3.20@574.8,121.65
DIFF2_N: J1.11 J3.16 | length 838.6
  Top Layer w7.55: v2(358.16,385.81) 362.56,381.41 ccw(c370.59,389.45) 370.59,378.08 379.28,378.08 379.35,378.08 ccw(c379.35,409.21) 401.76,387.6 405.02,390.86 ccw(c382.76,413.13) 414.24,413.13 414.24,451.09 cw(c478.35,451.09) 433.02,496.42 ccw(c381,549.89) 451.21,524.7 ccw(c415.52,537.43) 453.42,537.43 453.42,550.05 ccw(c416.59,550.05) 446.59,571.4 cw(c483.34,597.56) 438.24,598.4 cw(c470.75,597.8) 447.76,620.79 466.88,639.92 ccw(c440.37,666.43) 477.86,666.43 477.86,687.64 ccw(c458.5,687.64) 472.19,701.34 471.12,702.4 cw(c484.81,716.1) 465.45,716.1 J1.11@465.44,738.02
  Bottom Layer w7.55: v2(358.16,385.81) 358.37,385.6 ccw(c376.51,403.74) 376.51,378.08 431.77,378.08 cw(c431.77,334.99) 462.24,365.46 473.92,353.78 ; 473.34,354.36 473.84,353.86 ; J3.16@511.81,121.65 511.81,137.44 ccw(c493.42,137.44) 507.58,149.18 cw(c521.73,160.92) 503.34,160.92 503.34,169.81 ccw(c454.26,169.81) 488.96,204.52 453.07,240.41 cw(c471.53,258.88) 453.07,277.34 469.75,294.02 ; 469.75,294.02 473.89,298.17 ; 469.75,294.02 473.84,298.12 ccw(c445.98,325.99) 473.89,298.17 ; 473.84,353.86 cw(c445.98,325.99) 473.92,353.78 ; 473.84,353.86 cw(c445.98,325.99) 473.92,353.78 ; 473.89,298.17 ccw(c445.98,325.99) 485.39,325.99 ccw(c445.98,325.99) 473.92,353.78
DIFF2_P: J1.10 J3.14 | length 832.2
  Top Layer w7.55: v2(358.16,355.81) 362.56,360.2 cw(c370.59,352.17) 370.59,363.53 379.3,363.53 379.4,363.53 ccw(c379.4,409.1) 385.83,363.99 386.54,364.1 ccw(c379.35,409.21) 411.97,377.23 415.33,380.6 ccw(c382.83,413.1) 428.79,413.1 428.79,451.06 cw(c478.43,451.06) 443.33,486.16 ccw(c381,549.89) 464.91,519.8 ccw(c415.52,537.43) 467.97,537.43 467.97,550.05 ccw(c416.59,550.05) 458.44,579.84 cw(c483.34,597.56) 452.79,598.13 cw(c470.75,597.8) 458.05,610.51 477.17,629.63 ccw(c440.37,666.43) 492.41,666.43 492.41,689.94 cw(c506.32,689.94) J1.10@496.48,699.76 ; J1.10@496.48,699.77 496.89,700.18 ccw(c477.76,719.32) 504.82,719.32 J1.10@504.81,738.02
  Bottom Layer w7.55: v2(358.16,355.81) 358.37,356.02 cw(c376.51,337.87) 376.51,363.53 427.08,363.53 cw(c427.08,323.66) 455.27,351.86 463.6,343.52 ; 463.05,344.07 463.56,343.57 ; 463.56,308.41 442.78,287.63 ccw(c471.53,258.88) 442.78,230.13 478.68,194.23 cw(c454.26,169.81) 488.79,169.81 488.79,160.92 cw(c470.4,160.92) 484.56,149.18 ccw(c498.71,137.44) J3.14@480.32,137.44 ; 463.57,308.42 ccw(c445.98,325.99) 470.84,325.99 ccw(c445.98,325.99) 463.6,343.52 ; 463.62,343.51 ccw(c445.98,325.99) 463.56,343.57 ; J3.14@480.32,121.65 J3.14@480.31,137.41 ; 463.56,343.57 cw(c445.98,325.99) 463.6,343.52
DIFF3_N: J3.09 J4.14 | length 1128.9
  Top Layer w7.55: v2(416.58,-180.11) cw(c435.23,-161.46) 408.86,-161.46 408.85,-90.09 cw(c844.26,-90.09) 445.04,83.69 460.02,118.1 cw(c3222.18,-1084.26) 660.6,501.14 693.41,554.16 693.5,554.19 696.67,559.31 cw(c797.61,496.84) 713.67,580.78 723.67,590.77 cw(c746.21,568.23) 746.21,600.11 774.88,600.11 ccw(c774.88,632.58) 807.36,632.58 807.36,656.75 cw(c818.72,656.75) 810.69,664.78 v2(815.09,669.18)
  Bottom Layer w7.55: v2(416.58,-180.11) 412.18,-175.71 cw(c420.22,-167.67) 408.85,-167.67 408.85,-155.98 cw(c421.49,-155.98) 412.54,-147.06 413.35,-146.25 ccw(c403.78,-136.67) 417.32,-136.67 J3.09@417.32,-121.65 ; v2(815.09,669.18) ccw(c803.77,680.49) 819.77,680.49 J4.14@819.78,738.02
DIFF3_P: J3.07 J4.13 | length 1128.9
  Top Layer w7.55: v2(386.58,-180.11) ccw(c367.93,-161.46) 394.31,-161.46 394.31,-90.09 cw(c844.26,-90.09) 431.7,89.49 446.68,123.9 cw(c3222.18,-1084.26) 648.22,508.8 684.21,566.95 684.3,566.97 cw(c797.61,496.84) 703.38,591.06 713.38,601.06 cw(c746.21,568.23) 746.21,614.66 774.88,614.66 ccw(c774.88,632.58) 792.81,632.58 792.81,656.75 ccw(c781.45,656.75) 789.48,664.78 v2(785.09,669.18)
  Bottom Layer w7.55: J3.07@385.83,-121.65 385.82,-136.65 ccw(c399.37,-136.67) 389.8,-146.25 390.6,-147.05 cw(c381.66,-155.98) 394.3,-155.98 394.3,-167.69 cw(c382.94,-167.69) 390.97,-175.72 v2(386.58,-180.11) ; J4.13@780.41,738.02 780.4,680.49 ccw(c796.4,680.49) v2(785.09,669.18)
DIFF4_N: J3.15 J4.11 | length 1127.7
  Top Layer w7.55: v2(511.07,-180.11) 510.57,-179.61 cw(c528.02,-162.16) 503.35,-162.16 503.34,-58.51 cw(c621.92,-58.51) 538.07,25.33 572.56,59.82 ccw(c518.37,114.02) 595.01,114.02 595.01,132.78 cw(c916.05,132.78) 689.04,359.79 758.7,429.45 ccw(c718.36,469.78) 775.4,469.78 775.4,505.53 cw(c786.77,505.53) 778.73,513.56 v2(783.13,517.96)
  Bottom Layer w7.55: v2(511.07,-180.11) 506.67,-175.71 cw(c514.71,-167.67) 503.34,-167.67 503.34,-155.98 cw(c515.98,-155.98) 507.03,-147.06 507.84,-146.25 ccw(c498.27,-136.67) 511.81,-136.67 J3.15@511.81,-121.65 ; J4.11@702.09,737.59 697.02,702.43 cw(c682.73,715.49) 696.42,701.8 695.35,700.73 ccw(c710.09,685.99) 689.25,685.99 689.25,683.56 689.25,660.44 ccw(c727.07,660.44) 700.33,633.7 ccw(c721.42,654.8) 721.42,624.96 727.45,624.96 cw(c727.45,587.15) 754.88,613.17 cw(c708.59,565) 775.4,565 775.4,530.39 ccw(c786.77,530.39) 778.73,522.36 v2(783.13,517.96)
DIFF4_P: J3.13 J4.10 | length 1128.3
  Top Layer w7.55: v2(481.07,-180.11) 481.57,-179.61 ccw(c464.12,-162.16) 488.8,-162.16 488.8,-58.51 cw(c621.92,-58.51) 527.79,35.62 562.27,70.11 ccw(c518.37,114.02) 580.46,114.02 580.46,132.78 cw(c916.05,132.78) 678.75,370.08 748.41,439.73 ccw(c718.36,469.78) 760.85,469.78 760.85,505.53 ccw(c749.49,505.53) 757.53,513.56 v2(753.13,517.96)
  Bottom Layer w7.55: J3.13@480.32,-121.65 480.31,-136.65 ccw(c493.86,-136.67) 484.29,-146.25 485.09,-147.05 cw(c476.15,-155.98) 488.79,-155.98 488.79,-167.69 cw(c477.43,-167.69) 485.46,-175.72 v2(481.07,-180.11) ; J4.10@662.3,738.02 J4.10@666.95,702.43 ; J4.10@666.95,702.4 ccw(c683.8,711.93) 670.16,698.19 671.18,697.18 cw(c662.68,688.68) 674.7,688.68 674.7,660.44 ccw(c727.07,660.44) 690.04,623.41 ccw(c721.42,654.8) 721.42,610.41 727.45,610.41 cw(c727.45,587.15) 744.54,602.93 cw(c708.59,565) 760.85,565 760.85,530.39 cw(c749.49,530.39) 757.53,522.36 v2(753.13,517.96)
DIFF5_N: J3.21 J4.8 | length 1128.2
  Top Layer w7.55: v2(605.55,-180.11) 604.29,-178.85 cw(c619.9,-163.24) 597.83,-163.24 597.83,-78.29 cw(c701.14,-78.29) 628.09,-5.24 674.54,41.22 ccw(c628.33,87.42) 693.68,87.42 693.68,168.18 cw(c763.35,168.18) 714.08,217.45 744.5,247.86 ccw(c697.72,294.65) 763.88,294.65 763.88,307.95 cw(c790.26,307.95) v2(771.61,326.6)
  Bottom Layer w7.55: J4.8@583.56,738.02 579.47,702.43 cw(c563.39,714.59) 577.64,700.33 576.58,699.27 ccw(c589.7,686.14) 571.14,686.14 571.14,683.56 571.14,634.1 ccw(c594.34,634.1) 577.94,617.7 587.38,608.25 ccw(c627.56,648.43) 618.67,592.31 cw(c609.77,536.19) 651.03,575.26 ccw(c692.29,614.33) 653.19,573.1 cw(c610.08,527.64) 672.55,532.4 ccw(c735.02,537.17) 690.72,492.86 719.91,463.67 724.53,459.06 cw(c629.52,364.04) 763.88,364.04 763.88,342.64 ccw(c783.96,342.64) 769.76,328.45 v2(771.61,326.6) ; v2(605.55,-180.11) 601.15,-175.71 cw(c609.19,-167.67) 597.82,-167.67 597.82,-155.98 cw(c610.46,-155.98) 601.51,-147.06 602.32,-146.25 ccw(c592.75,-136.67) 606.29,-136.67 J3.21@606.3,-121.65
DIFF5_P: J3.19 J4.7 | length 1128.2
  Top Layer w7.55: v2(575.55,-180.11) 576.81,-178.85 ccw(c561.2,-163.24) 583.27,-163.24 583.27,-78.29 cw(c701.14,-78.29) 617.8,5.05 664.25,51.5 ccw(c628.33,87.42) 679.13,87.42 679.13,168.18 cw(c763.35,168.18) 703.8,227.73 734.21,258.15 ccw(c697.72,294.65) 749.33,294.65 749.33,307.95 ccw(c722.96,307.95) v2(741.61,326.6)
  Bottom Layer w7.55: J4.7@544.18,738.02 J4.7@548.94,702.43 ; J4.7@548.94,702.41 ccw(c566.06,711.47) 552.42,697.72 553.38,696.76 cw(c545.82,689.09) 556.59,689.09 556.59,634.1 ccw(c594.34,634.1) 567.65,607.41 577.09,597.96 ccw(c627.56,648.43) 616.39,577.94 cw(c609.77,536.19) 640.47,565.25 ccw(c692.29,614.33) 643.18,562.54 cw(c610.08,527.64) 658.04,531.29 ccw(c735.02,537.17) 680.43,482.58 709.62,453.38 714.24,448.77 cw(c629.52,364.04) 749.33,364.04 749.33,342.64 cw(c729.26,342.64) 743.45,328.45 v2(741.61,326.6) ; J3.19@574.8,-121.65 574.8,-136.67 ccw(c588.34,-136.67) 578.77,-146.25 579.57,-147.05 cw(c570.63,-155.98) 583.27,-155.98 583.27,-167.69 cw(c571.91,-167.69) 579.94,-175.72 v2(575.55,-180.11)
EN_0: J1.5 J3.31 T2.1 | length 1998
  Top Layer w6: J1.5@701.67,738.02 701.67,791.43 761.92,851.68 870.92,851.68 912.22,810.38 912.22,772.28 922.82,761.68 1054.7,761.68 1086.71,729.67 1121.78,729.67 1170.83,680.62 1170.83,652.82 1226.77,596.88 1226.77,231.68 T2.1@1176.77,181.68 1129.27,134.18 1098.67,134.18 1047.09,185.76 930.26,185.76 888.35,143.86 888.35,-113.74 812.01,-190.08 788.53,-190.08 v1(763.77,-165.32)
  Bottom Layer w6: v1(763.77,-165.32) J3.31@763.78,-121.65
EN_1: J3.33 J4.5 T3.1 | length 1662.8
  Top Layer w6: v1(795.27,-165.32) 836.77,-123.82 836.77,218.62 894.06,275.92 906.01,275.92 v2(941.77,311.68) T3.1@991.77,311.68
  Bottom Layer w6: J4.5@465.44,738.02 465.44,797.2 508.28,840.04 844.28,840.04 882.28,802.04 882.28,719.04 906.77,694.55 906.77,396.68 941.77,361.68 v2(941.77,311.68) ; v1(795.27,-165.32) J3.33@795.28,-121.65
GND: C1.1 C2.1 J1.6 J1.9 J1.12 J1.15 J1.M1 J1.M2 J3.05 J3.06 J3.11 J3.12 J3.17 J3.18 J3.23 J3.24 J3.29 J3.30 J3.G1 J3.G2 J3.G3 J3.G4 J4.6 J4.9 J4.12 J4.15 J4.M1 J4.M2 U1.2 U1.3 U1.7 | length 1167.3
  Top Layer w10: v1(307.97,678.04) J1.15@307.96,738.02 ; v1(426.08,680.24) J1.12@426.07,738.02 ; J1.9@544.18,738.02 v1(544.18,795.04) ; J1.6@662.3,738.02 v1(662.29,795.04)
  Bottom Layer w10: J4.6@504.81,738.02 v1(504.82,795.04) ; J4.9@622.93,738.02 v1(622.93,795.04) ; v1(741.03,677.42) J4.12@741.03,738.02 ; J4.15@859.15,738.02 v1(859.14,795.04)
  Bottom Layer w11: U1.7@1019.77,216.68 v2(1019.77,273.04)
  Bottom Layer w13: v2(1059.6,626.68) C1.1@1059.6,652.79 ; v2(1116.77,261.68) 1122.77,255.68 U1.3@1122.77,216.68 ; U1.2@1147.77,216.68 v2(1147.77,261.68) ; C2.1@1149.83,516.68 v2@1149.83,544.74
  Bottom Layer w15: v1(354.33,-174) J3.05@354.33,-121.65 ; J3.06@354.34,121.65 v1(354.34,169) ; v1(436.09,186.05) 448.82,173.32 J3.12@448.82,121.65 ; v1(448.82,-169) J3.11@448.82,-121.65 ; v1(543.31,-169) J3.17@543.31,-121.65 ; J3.18@543.31,121.65 v1(543.31,169) ; v1(637.79,-169) J3.23@637.8,-121.65 ; J3.24@637.8,121.65 v1(637.79,169) ; v1(732.28,-169) J3.29@732.28,-121.65 ; J3.30@732.28,121.65 v1(732.28,169)
  other v1: -19.45,-211 60.55,-211 140.55,-211 220.55,-211 300.55,-211 380.55,-211 460.55,-211 540.55,-211 620.55,-211 700.55,-211 780.55,-211 860.55,-211 940.55,-211 1020.55,-211 1100.55,-211 1180.55,-211 -48.23,-180.32 60.55,-131 940.55,-131 1020.55,-131 1100.55,-131 1180.55,-131 -48.23,-130.32 354.32,-74.32 448.8,-74.32 543.29,-74.32 637.78,-74.32 -48.13,-63.13 60.55,-51 290.55,-51 1020.55,-51 1100.55,-51 701.77,-35.32 781.77,-35.32 861.77,-35.32 941.77,-35.32 358.29,-29.32 453.29,-29.32 553.29,-29.32 583.29,25.68 708.29,25.68 210.55,29 290.55,29 1020.55,29 1100.55,29 368.29,30.68 478.29,30.68 781.77,59.68 861.77,59.68 941.77,59.68 393.29,70.68 503.29,70.68 623.29,70.68 728.29,70.68 60.55,109 210.55,109 1100.55,109 -48.23,109.68 941.77,139.68 1021.77,139.68 60.55,189 210.55,189 290.55,189 -48.23,189.68 756.77,209.68 411.77,214.68 641.77,229.68 796.77,254.68 60.55,269 210.55,269 290.55,269 -48.23,269.68 392.94,270.52 728.88,297.07 783.88,297.07 431.77,329.68 330.16,344.53 60.55,349 210.55,349 290.55,349 -48.23,349.68 611.77,354.68 518.18,361 801.77,364.68 881.77,364.68 330.16,399.53 468.37,405.88 60.55,429 210.55,429 290.55,429 -48.23,429.68 801.77,444.68 881.77,444.68 573.57,446.02 668.98,448.62 468.37,460.88 740.4,488.43 795.4,488.43 60.55,509 210.55,509 290.55,509 -48.23,509.68 499.13,511.79 881.77,524.68 976.77,524.68 618.29,530.68 408.29,540.68 348.29,545.68 301.77,574.68 60.55,589 -48.23,589.68 881.77,604.68 976.77,604.68 518.81,621.64 301.77,629.68 644.53,631.16 331.77,664.68 60.55,669 -48.23,669.68 60.55,749 -48.23,749.68 60.55,829 -48.23,829.68 906.77,871.68 906.77,901.68 60.55,909 -48.23,909.68 -19.45,983 60.55,983 140.55,983 220.55,983 300.55,983
  other v2: 1149.84,544.75 772.36,639.65 827.36,639.65
ID: J3.36 U1.1 | length 574.8
  Top Layer w6: v2(861.77,204.68) 881.77,224.68 950.39,224.68 956.29,218.78 1133.87,218.78 1173.77,258.68 v2(1173.77,306.68)
  Bottom Layer w6: J3.36@826.77,121.65 826.77,169.68 v2(861.77,204.68) ; U1.1@1173.77,216.68 v2(1173.77,306.68)
LED_0: J1.4 J3.38 T4.1 | length 1466.4
  Top Layer w6: J1.4@741.04,738.02 741.04,790.8 786.92,836.68 866.12,836.68 898.22,804.58 898.22,766.48 917.02,747.68 1045.17,747.68 1082.71,710.14 1121.31,710.14 1153.05,678.4 1153.05,643.53 1211.77,584.81 1211.77,266.68 1126.77,181.68 T4.1@1101.77,181.68 1078.77,204.68 v2(896.77,204.68)
  Bottom Layer w6: J3.38@858.27,121.65 858.26,166.17 v2(896.77,204.68)
LED_1: J3.40 J4.4 T5.1 | length 1358
  Top Layer w6: v2(956.77,376.68) T5.1@991.77,376.68
  Bottom Layer w6: J4.4@426.07,738.02 426.07,795.83 491.65,861.41 846.91,861.41 896.28,812.04 896.28,735.04 921.77,709.55 921.77,411.68 v2(956.77,376.68) 961.77,371.68 961.77,239.68 889.76,167.67 J3.40@889.76,121.65
NetR1_1: R1.1 U1.4 | length 107.8
  Bottom Layer w6: U1.4@1096.77,216.68 1096.77,159.55 1113.28,143.04 R1.1@1140.57,143.04
NetR2_1: R2.1 U1.8 | length 68.5
  Bottom Layer w6: R2.1@1016.77,513.96 1019.77,510.95 U1.8@1019.77,446.68
NetT1_1: T1.1 U1.11 | length 158.6
  Top Layer w6: v2(1051.77,341.68) T1.1@1051.77,376.68
  Bottom Layer w6: v2(1051.77,341.68) 1096.77,386.68 U1.11@1096.77,446.68
P3V3D: C1.2 C2.2 J1.1 J3.01 J4.1 R1.2 R2.2 RN1.5 RN1.6 RN1.7 RN1.8 U1.14 | length 471.8
  Bottom Layer w10.81: RN1.6@1122.7,686.65 1122.7,719.99 ; RN1.7@1142.39,686.65 1142.38,719.99
  Bottom Layer w13: U1.14@1173.77,446.68 1173.77,488.68 1183.68,498.59 C2.2@1183.68,516.68 1211.76,516.68
  Bottom Layer w15: R2.2@1016.77,549.39 1016.77,706.68 ; 1059.6,721.68 C1.2@1059.6,686.64 RN1.5@1101.05,686.65 ; RN1.8@1164.04,686.65 1164.05,718.5 ; R1.2@1176,143.04 1213.28,143.04
  other v1: 281.77,849.68 281.77,874.68
  other v2: 993.28,678.04 993.28,708.04 1093.28,948.04 1093.28,973.04
SCL33: J3.32 U1.12 | length 617.5
  Top Layer w6: v2(941.77,273.04) 980.12,273.04 1001.37,251.79 1056.88,251.79 1122.77,317.68 v2(1122.77,376.68)
  Bottom Layer w6: J3.32@763.78,121.65 763.78,174.05 862.77,273.04 v2(941.77,273.04) ; v2(1122.77,376.68) U1.12@1122.77,446.68
SDA33: J3.34 U1.13 | length 597
  Top Layer w6: v2(896.77,244.68) 973.77,244.68 981.77,236.68 1061.77,236.68 1151.77,326.68 v2(1151.77,376.68)
  Bottom Layer w6: J3.34@795.28,121.65 795.27,168.18 871.77,244.68 v2(896.77,244.68) ; U1.13@1147.77,446.68 1147.77,380.68 v2(1151.77,376.68)
pads on no net: J3. J3.02 J3.03 J3.04 J3.08 J3.10 J3.25 J3.27 J3.35 J3.37 J3.39

## Polygon pours and split planes (outlines as drawn)
GND on L02_GND "L02_GND-GND" (solid, pour order 1): -79.01,961.01 -78.82,965.36 -78.25,969.69 -77.3,973.95 -75.99,978.11 -74.32,982.14 -72.31,986.01 -69.97,989.68 -67.31,993.14 -64.36,996.36 -61.15,999.31 -57.69,1001.96 -54.01,1004.31 -50.14,1006.32 -46.11,1007.99 -41.95,1009.3 -37.69,1010.25 -33.37,1010.81 -29.01,1011.01 746.77,1011.01 1210.11,1011.01 1214.47,1010.81 1218.79,1010.25 1223.05,1009.3 1227.21,1007.99 1231.24,1006.32 1235.11,1004.31 1238.79,1001.96 1242.25,999.31 1245.47,996.36 1248.41,993.14 1251.07,989.68 1253.41,986.01 1255.43,982.14 1257.1,978.11 1258.41,973.95 1259.35,969.69 1259.92,965.36 1260.11,961.01 1260.11,-188.99 1259.92,-193.35 1259.35,-197.68 1258.41,-201.94 1257.1,-206.1 1255.43,-210.13 1253.41,-213.99 1251.07,-217.67 1248.41,-221.13 1245.47,-224.35 1242.25,-227.3 1238.79,-229.95 1235.11,-232.3 1231.24,-234.31 1227.21,-235.98 1223.05,-237.29 1218.79,-238.24 1214.47,-238.8 1210.11,-238.99 786.77,-238.99 -29.01,-238.99 -33.37,-238.8 -37.69,-238.24 -41.95,-237.29 -46.11,-235.98 -50.14,-234.31 -54.01,-232.3 -57.69,-229.95 -61.15,-227.3 -64.36,-224.35 -67.31,-221.13 -69.97,-217.67 -72.31,-213.99 -74.32,-210.13 -75.99,-206.1 -77.3,-201.94 -78.25,-197.68 -78.82,-193.35 -79.01,-188.99 -79.01,961.01
GND on L03_GND "L03_GND-GND" (solid, pour order 2): -79.01,961.01 -78.82,965.36 -78.25,969.69 -77.3,973.95 -75.99,978.11 -74.32,982.14 -72.31,986.01 -69.97,989.68 -67.31,993.14 -64.36,996.36 -61.15,999.31 -57.69,1001.96 -54.01,1004.31 -50.14,1006.32 -46.11,1007.99 -41.95,1009.3 -37.69,1010.25 -33.37,1010.81 -29.01,1011.01 746.77,1011.01 1210.11,1011.01 1214.47,1010.81 1218.79,1010.25 1223.05,1009.3 1227.21,1007.99 1231.24,1006.32 1235.11,1004.31 1238.79,1001.96 1242.25,999.31 1245.47,996.36 1248.41,993.14 1251.07,989.68 1253.41,986.01 1255.43,982.14 1257.1,978.11 1258.41,973.95 1259.35,969.69 1259.92,965.36 1260.11,961.01 1260.11,-188.99 1259.92,-193.35 1259.35,-197.68 1258.41,-201.94 1257.1,-206.1 1255.43,-210.13 1253.41,-213.99 1251.07,-217.67 1248.41,-221.13 1245.47,-224.35 1242.25,-227.3 1238.79,-229.95 1235.11,-232.3 1231.24,-234.31 1227.21,-235.98 1223.05,-237.29 1218.79,-238.24 1214.47,-238.8 1210.11,-238.99 786.77,-238.99 -29.01,-238.99 -33.37,-238.8 -37.69,-238.24 -41.95,-237.29 -46.11,-235.98 -50.14,-234.31 -54.01,-232.3 -57.69,-229.95 -61.15,-227.3 -64.36,-224.35 -67.31,-221.13 -69.97,-217.67 -72.31,-213.99 -74.32,-210.13 -75.99,-206.1 -77.3,-201.94 -78.25,-197.68 -78.82,-193.35 -79.01,-188.99 -79.01,961.01
GND on Bottom Layer "BOTTOM-GND" (solid, pour order 5): -79.01,961 -78.82,965.36 -78.25,969.68 -77.31,973.94 -76,978.1 -74.33,982.13 -72.31,986 -69.97,989.68 -67.31,993.14 -64.37,996.36 -61.15,999.3 -57.69,1001.96 -54.01,1004.3 -50.14,1006.32 -46.11,1007.99 -41.95,1009.3 -37.7,1010.24 -33.37,1010.81 -29.01,1011 746.77,1011 1210.11,1011 1214.47,1010.81 1218.79,1010.24 1223.05,1009.3 1227.21,1007.99 1231.24,1006.32 1235.11,1004.3 1238.79,1001.96 1242.25,999.3 1245.46,996.36 1248.41,993.14 1251.06,989.68 1253.41,986 1255.42,982.13 1257.09,978.1 1258.4,973.94 1259.35,969.68 1259.92,965.36 1260.11,961 1260.11,-189 1259.92,-193.36 1259.35,-197.68 1258.4,-201.94 1257.09,-206.1 1255.42,-210.13 1253.41,-214 1251.06,-217.68 1248.41,-221.14 1245.46,-224.35 1242.25,-227.3 1238.79,-229.96 1235.11,-232.3 1231.24,-234.31 1227.21,-235.98 1223.05,-237.3 1218.79,-238.24 1214.47,-238.81 1210.11,-239 786.77,-239 -29.01,-239 -33.37,-238.81 -37.7,-238.24 -41.95,-237.3 -46.11,-235.98 -50.14,-234.31 -54.01,-232.3 -57.69,-229.96 -61.15,-227.3 -64.37,-224.35 -67.31,-221.14 -69.97,-217.68 -72.31,-214 -74.33,-210.13 -76,-206.1 -77.31,-201.94 -78.25,-197.68 -78.82,-193.36 -79.01,-189
GND on Top Layer "TOP-GND" (solid, pour order 4): -79.01,961 -78.82,965.36 -78.25,969.68 -77.31,973.94 -76,978.1 -74.33,982.13 -72.31,986 -69.97,989.68 -67.31,993.14 -64.37,996.36 -61.15,999.3 -57.69,1001.96 -54.01,1004.3 -50.14,1006.32 -46.11,1007.99 -41.95,1009.3 -37.7,1010.24 -33.37,1010.81 -29.01,1011 746.77,1011 1210.11,1011 1214.47,1010.81 1218.79,1010.24 1223.05,1009.3 1227.21,1007.99 1231.24,1006.32 1235.11,1004.3 1238.79,1001.96 1242.25,999.3 1245.46,996.36 1248.41,993.14 1251.06,989.68 1253.41,986 1255.42,982.13 1257.09,978.1 1258.4,973.94 1259.35,969.68 1259.92,965.36 1260.11,961 1260.11,-189 1259.92,-193.36 1259.35,-197.68 1258.4,-201.94 1257.09,-206.1 1255.42,-210.13 1253.41,-214 1251.06,-217.68 1248.41,-221.14 1245.46,-224.35 1242.25,-227.3 1238.79,-229.96 1235.11,-232.3 1231.24,-234.31 1227.21,-235.98 1223.05,-237.3 1218.79,-238.24 1214.47,-238.81 1210.11,-239 786.77,-239 -29.01,-239 -33.37,-238.81 -37.7,-238.24 -41.95,-237.3 -46.11,-235.98 -50.14,-234.31 -54.01,-232.3 -57.69,-229.96 -61.15,-227.3 -64.37,-224.35 -67.31,-221.14 -69.97,-217.68 -72.31,-214 -74.33,-210.13 -76,-206.1 -77.31,-201.94 -78.25,-197.68 -78.82,-193.36 -79.01,-189

## Keep-outs
Top Layer:
  drawing of 27 lines, arcs and shapes, not listed
L02_GND:
  region: 378.16,389.83 378.16,351.78 378.08,350.03 377.85,348.3 377.47,346.6 376.95,344.94 376.28,343.32 375.48,341.78 374.54,340.31 373.48,338.92 372.3,337.64 371.01,336.46 369.63,335.39 368.16,334.46 366.61,333.65 365,332.98 363.33,332.46 361.63,332.08 359.9,331.85 358.16,331.78 356.41,331.85 354.68,332.08 352.98,332.46 351.32,332.98 349.7,333.65 348.16,334.46 346.68,335.39 345.3,336.46 344.01,337.64 342.84,338.92 341.77,340.31 340.84,341.78 340.03,343.32 339.36,344.94 338.84,346.6 338.46,348.3 338.23,350.03 338.16,351.78 338.16,389.83 338.23,391.57 338.46,393.3 338.84,395.01 339.36,396.67 340.03,398.28 340.84,399.83 341.77,401.3 342.84,402.68 344.01,403.97 345.3,405.15 346.68,406.21 348.16,407.15 349.7,407.96 351.32,408.62 352.98,409.15 354.68,409.53 356.41,409.75 358.16,409.83 359.9,409.75 361.63,409.53 363.33,409.15 365,408.62 366.61,407.96 368.16,407.15 369.63,406.21 371.01,405.15 372.3,403.97 373.48,402.68 374.54,401.3 375.48,399.83 376.28,398.28 376.95,396.67 377.47,395.01 377.85,393.3 378.08,391.57
  region: 516.36,451.17 516.36,413.12 516.28,411.37 516.05,409.64 515.67,407.94 515.15,406.28 514.48,404.66 513.68,403.12 512.74,401.65 511.68,400.26 510.5,398.98 509.21,397.8 507.83,396.73 506.36,395.8 504.81,394.99 503.2,394.32 501.53,393.8 499.83,393.42 498.1,393.19 496.36,393.12 494.61,393.19 492.88,393.42 491.18,393.8 489.52,394.32 487.9,394.99 486.36,395.8 484.88,396.73 483.5,397.8 482.21,398.98 481.04,400.26 479.97,401.65 479.04,403.12 478.23,404.66 477.56,406.28 477.04,407.94 476.66,409.64 476.43,411.37 476.36,413.12 476.36,451.17 476.43,452.91 476.66,454.64 477.04,456.35 477.56,458.01 478.23,459.62 479.04,461.17 479.97,462.64 481.04,464.02 482.21,465.31 483.5,466.49 484.88,467.55 486.36,468.49 487.9,469.3 489.52,469.96 491.18,470.49 492.88,470.87 494.61,471.09 496.36,471.17 498.1,471.09 499.83,470.87 501.53,470.49 503.2,469.96 504.81,469.3 506.36,468.49 507.83,467.55 509.21,466.49 510.5,465.31 511.68,464.02 512.74,462.64 513.68,461.17 514.48,459.62 515.15,458.01 515.67,456.35 516.05,454.64 516.28,452.91
  region: 571.53,-160.11 609.58,-160.11 611.33,-160.19 613.06,-160.42 614.76,-160.8 616.42,-161.32 618.04,-161.99 619.58,-162.79 621.05,-163.73 622.44,-164.79 623.72,-165.97 624.9,-167.26 625.97,-168.64 626.9,-170.11 627.71,-171.66 628.38,-173.27 628.9,-174.94 629.28,-176.64 629.51,-178.37 629.58,-180.11 629.51,-181.86 629.28,-183.59 628.9,-185.29 628.38,-186.95 627.71,-188.57 626.9,-190.11 625.97,-191.59 624.9,-192.97 623.72,-194.26 622.44,-195.43 621.05,-196.5 619.58,-197.43 618.04,-198.24 616.42,-198.91 614.76,-199.43 613.06,-199.81 611.33,-200.04 609.58,-200.11 571.53,-200.11 569.79,-200.04 568.06,-199.81 566.35,-199.43 564.69,-198.91 563.08,-198.24 561.53,-197.43 560.06,-196.5 558.68,-195.43 557.39,-194.26 556.21,-192.97 555.15,-191.59 554.21,-190.11 553.4,-188.57 552.74,-186.95 552.21,-185.29 551.83,-183.59 551.61,-181.86 551.53,-180.11 551.61,-178.37 551.83,-176.64 552.21,-174.94 552.74,-173.27 553.4,-171.66 554.21,-170.11 555.15,-168.64 556.21,-167.26 557.39,-165.97 558.68,-164.79 560.06,-163.73 561.53,-162.79 563.08,-161.99 564.69,-161.32 566.35,-160.8 568.06,-160.42 569.79,-160.19
  region: 382.56,-160.11 420.61,-160.11 422.36,-160.19 424.08,-160.42 425.79,-160.8 427.45,-161.32 429.06,-161.99 430.61,-162.79 432.07,-163.73 433.47,-164.79 434.74,-165.97 435.92,-167.26 436.99,-168.64 437.92,-170.11 438.73,-171.66 439.4,-173.27 439.92,-174.94 440.31,-176.64 440.54,-178.37 440.61,-180.11 440.54,-181.86 440.31,-183.59 439.92,-185.29 439.4,-186.95 438.73,-188.57 437.92,-190.11 436.99,-191.59 435.92,-192.97 434.74,-194.26 433.47,-195.43 432.07,-196.5 430.61,-197.43 429.06,-198.24 427.45,-198.91 425.79,-199.43 424.08,-199.81 422.36,-200.04 420.61,-200.11 382.56,-200.11 380.81,-200.04 379.08,-199.81 377.38,-199.43 375.72,-198.91 374.11,-198.24 372.56,-197.43 371.08,-196.5 369.71,-195.43 368.41,-194.26 367.23,-192.97 366.17,-191.59 365.23,-190.11 364.42,-188.57 363.76,-186.95 363.23,-185.29 362.86,-183.59 362.64,-181.86 362.56,-180.11 362.64,-178.37 362.86,-176.64 363.23,-174.94 363.76,-173.27 364.42,-171.66 365.23,-170.11 366.17,-168.64 367.23,-167.26 368.41,-165.97 369.71,-164.79 371.08,-163.73 372.56,-162.79 374.11,-161.99 375.72,-161.32 377.38,-160.8 379.08,-160.42 380.81,-160.19
  region: 477.04,-160.11 515.09,-160.11 516.84,-160.19 518.56,-160.42 520.27,-160.8 521.93,-161.32 523.54,-161.99 525.09,-162.79 526.55,-163.73 527.95,-164.79 529.22,-165.97 530.4,-167.26 531.47,-168.64 532.4,-170.11 533.21,-171.66 533.88,-173.27 534.4,-174.94 534.79,-176.64 535.02,-178.37 535.09,-180.11 535.02,-181.86 534.79,-183.59 534.4,-185.29 533.88,-186.95 533.21,-188.57 532.4,-190.11 531.47,-191.59 530.4,-192.97 529.22,-194.26 527.95,-195.43 526.55,-196.5 525.09,-197.43 523.54,-198.24 521.93,-198.91 520.27,-199.43 518.56,-199.81 516.84,-200.04 515.09,-200.11 477.04,-200.11 475.29,-200.04 473.56,-199.81 471.86,-199.43 470.2,-198.91 468.59,-198.24 467.04,-197.43 465.56,-196.5 464.19,-195.43 462.89,-194.26 461.71,-192.97 460.65,-191.59 459.71,-190.11 458.9,-188.57 458.24,-186.95 457.71,-185.29 457.34,-183.59 457.12,-181.86 457.04,-180.11 457.12,-178.37 457.34,-176.64 457.71,-174.94 458.24,-173.27 458.9,-171.66 459.71,-170.11 460.65,-168.64 461.71,-167.26 462.89,-165.97 464.19,-164.79 465.56,-163.73 467.04,-162.79 468.59,-161.99 470.2,-161.32 471.86,-160.8 473.56,-160.42 475.29,-160.19
  region: 452.44,697.65 478.46,697.65 478.46,778.39 452.44,778.39
  region: 781.06,689.18 819.11,689.18 820.86,689.1 822.59,688.87 824.29,688.49 825.95,687.97 827.57,687.3 829.11,686.5 830.58,685.56 831.97,684.5 833.25,683.32 834.43,682.03 835.5,680.65 836.43,679.18 837.24,677.63 837.91,676.02 838.43,674.35 838.81,672.65 839.04,670.92 839.11,669.18 839.04,667.43 838.81,665.7 838.43,664 837.91,662.34 837.24,660.72 836.43,659.18 835.5,657.7 834.43,656.32 833.25,655.03 831.97,653.86 830.58,652.79 829.11,651.86 827.57,651.05 825.95,650.38 824.29,649.86 822.59,649.48 820.86,649.25 819.11,649.18 781.06,649.18 779.32,649.25 777.59,649.48 775.88,649.86 774.22,650.38 772.61,651.05 771.06,651.86 769.59,652.79 768.21,653.86 766.92,655.03 765.74,656.32 764.68,657.7 763.74,659.18 762.93,660.72 762.27,662.34 761.74,664 761.36,665.7 761.14,667.43 761.06,669.18 761.14,670.92 761.36,672.65 761.74,674.35 762.27,676.02 762.93,677.63 763.74,679.18 764.68,680.65 765.74,682.03 766.92,683.32 768.21,684.5 769.59,685.56 771.06,686.5 772.61,687.3 774.22,687.97 775.88,688.49 777.59,688.87 779.32,689.1
  region: 491.81,697.65 517.83,697.65 517.83,778.39 491.81,778.39
  region: 609.92,697.65 635.94,697.65 635.94,778.39 609.92,778.39
  region: 749.11,537.96 787.16,537.96 788.91,537.88 790.64,537.65 792.34,537.27 794,536.75 795.62,536.08 797.16,535.28 798.63,534.34 800.02,533.28 801.3,532.1 802.48,530.81 803.55,529.43 804.48,527.96 805.29,526.41 805.96,524.8 806.48,523.13 806.86,521.43 807.09,519.7 807.16,517.96 807.09,516.21 806.86,514.48 806.48,512.78 805.96,511.12 805.29,509.5 804.48,507.96 803.55,506.48 802.48,505.1 801.3,503.81 800.02,502.64 798.63,501.57 797.16,500.64 795.62,499.83 794,499.16 792.34,498.64 790.64,498.26 788.91,498.03 787.16,497.96 749.11,497.96 747.37,498.03 745.64,498.26 743.93,498.64 742.27,499.16 740.66,499.83 739.11,500.64 737.64,501.57 736.26,502.64 734.97,503.81 733.79,505.1 732.73,506.48 731.79,507.96 730.98,509.5 730.32,511.12 729.79,512.78 729.41,514.48 729.19,516.21 729.11,517.96 729.19,519.7 729.41,521.43 729.79,523.13 730.32,524.8 730.98,526.41 731.79,527.96 732.73,529.43 733.79,530.81 734.97,532.1 736.26,533.28 737.64,534.34 739.11,535.28 740.66,536.08 742.27,536.75 743.93,537.27 745.64,537.65 747.37,537.88